# EAGLE board Rov3_zasilanie_v1 (EAGLE 9.4.1)
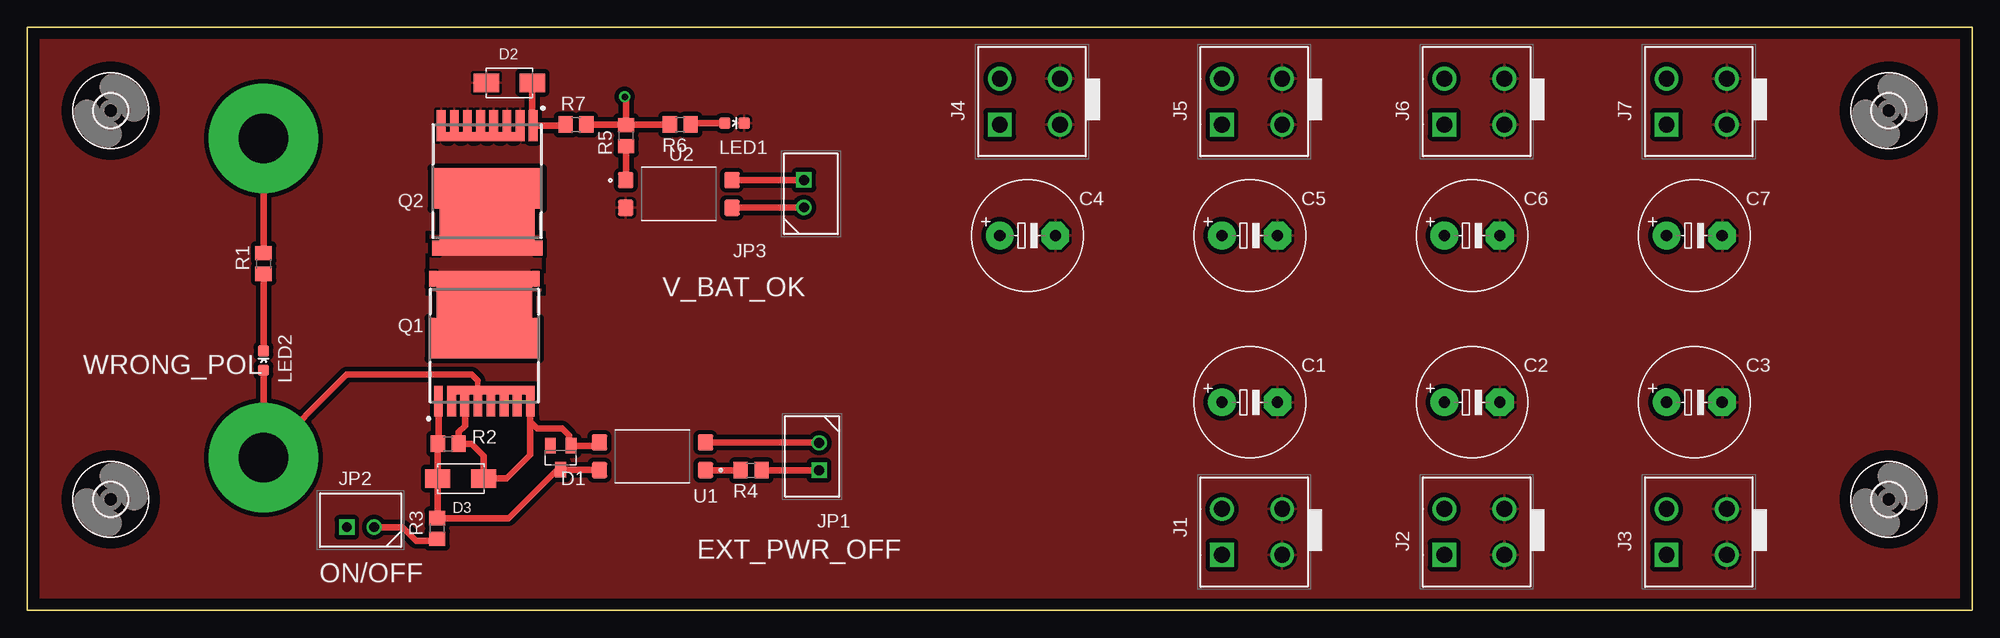
[diagram p0: board, top side]
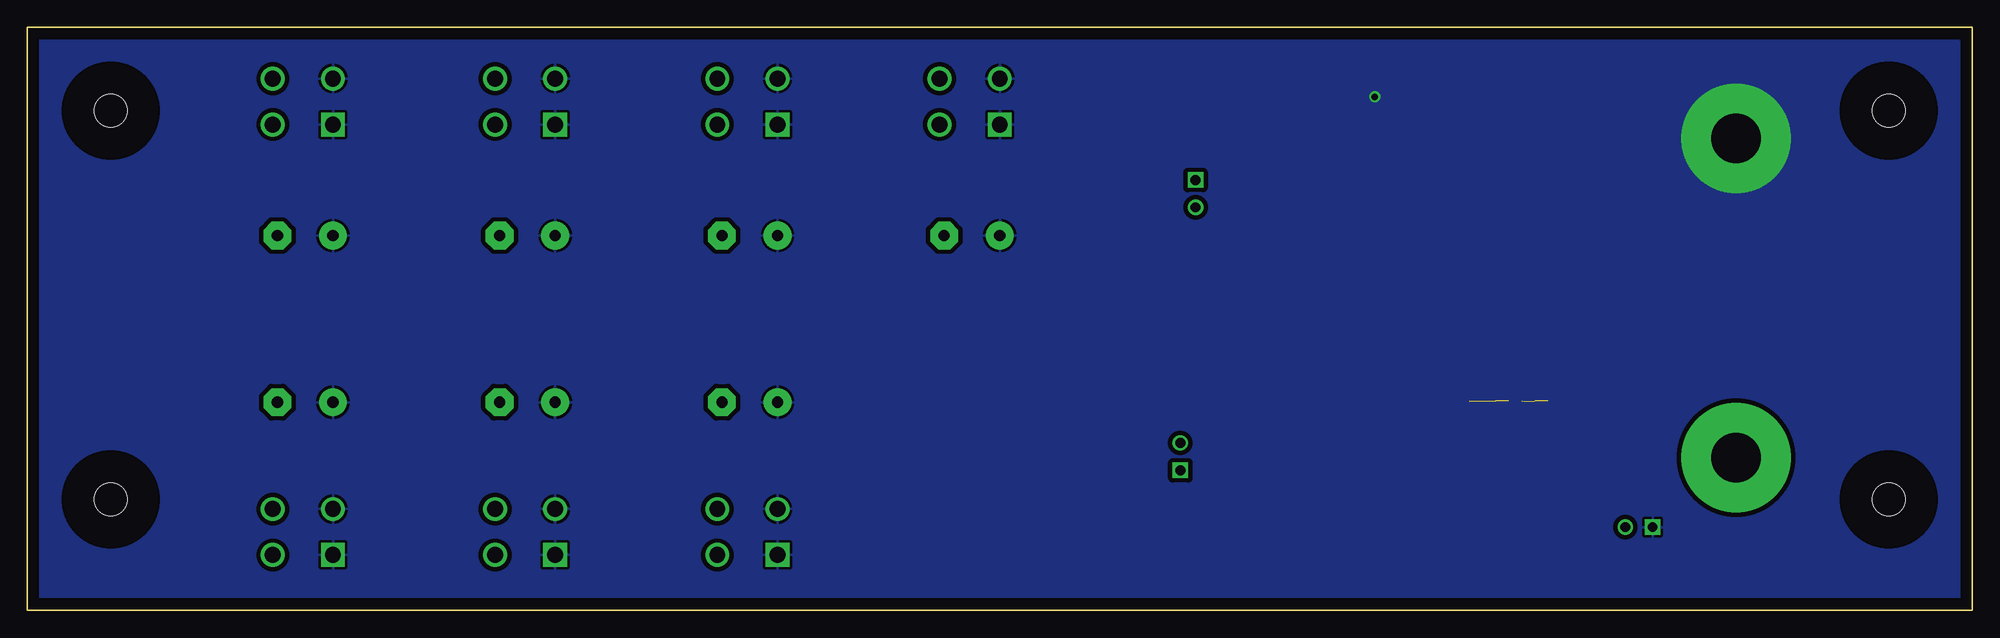
[diagram p1: board, bottom side, seen from below]

Size 177.8 x 53.34 mm. Coordinates in mm from the lower left corner, seen from the top.
Outline: 0,0 177.8,0 177.8,53.34 0,53.34 0,0
Copper layers (1*16): Top 0.035mm / dielectric 1.5mm / Bottom 0.035mm
Design rules "default": minimum track width 6mil, minimum drill 0.35mm, track to track 6mil, track to pad 6mil, pad to pad 6mil, via to via 6mil, smd to smd 6mil, copper to edge 40mil, drill to drill 6mil, minimum pad ring 10mil, minimum via ring 8mil, stop-mask expansion 4mil, vias tented up to drill 0mil, thermal gap 10mil
Net classes: 0 supply: width 0.5 mm, clearance 0.2 mm; 1 signal: width 0.4 mm, drill 0.4 mm, clearance 0.2 mm

## Footprints (pad centres in the part's own frame; a part is rotated, then mirrored left to right if it is on the bottom)
E5-10,5 = drill 1.016 pad 2.54: + -2.54,0 | drill 1.016 pad 2.54 octagon: - 2.54,0
SOT23 = smd 1 x 1.4: 1 -0.95,-1.1; 2 0.95,-1.1; 3 0,1.1
VARTVSP_SMA/DO-214AC = smd 2.3 x 1.7: 1 -2.1,0; 2 2.1,0
MOLEX_2X2_PCB_SOCKET = drill 1.45 pad 2.175 square: 1 -2.54,2.54 | drill 1.45 pad 2.175: 2 -2.54,-2.96; 3 1.66,2.54; 4 1.66,-2.96
2.50MM_MINI-SPOX_2PIN_PCB_SOCKET = drill 0.9 pad 1.35 square: 1 1.27,0 | drill 0.9 pad 1.35: 2 -1.23,0
0603-GREEN = smd 1 x 1: A 0,-0.877; C 0,0.877
0603-RED = smd 1 x 1: A 0,-0.877; C 0,0.877
PG-HSOF-8-1 = smd 0.8 x 2.8: 1 -4.33,-4.982; 2 -3.13,-4.982; 3 -1.93,-4.982; 4 -0.73,-4.982; 5 0.47,-4.982; 6 1.67,-4.982; 7 2.87,-4.982; 8 4.07,-4.982 | smd 8.7 x 8: 9 -0.13,2.918 | smd 0.5 x 0.8: 10 -2.53,-3.982; 11 -1.33,-3.982; 12 -0.13,-3.982; 13 1.07,-3.982; 14 2.27,-3.982; 15 3.47,-3.982 | smd 0.7 x 3.7: 16 -4.83,0.768; 17 4.57,0.768 | smd 0.7 x 1.4: 18 -4.83,6.218; 19 4.57,6.218
R0805 = smd 1.3 x 1.5: 1 -0.95,0; 2 0.95,0
SOIC254P1030X390-4N_EL817S1(A)(TU)-V = smd 1.41 x 1.47: 1 -4.85,1.27; 2 -4.85,-1.27; 3 4.85,-1.27; 4 4.85,1.27
3,0 = hole 3: 0,0

## Placement (x,y rotation side)
C1  [E5-10,5]  111.76,19.05 0 top
C2  [E5-10,5]  132.08,19.05 0 top
C3  [E5-10,5]  152.4,19.05 0 top
C4  [E5-10,5]  91.44,34.29 0 top
C5  [E5-10,5]  111.76,34.29 0 top
C6  [E5-10,5]  132.08,34.29 0 top
C7  [E5-10,5]  152.4,34.29 0 top
D1  BAT54  [SOT23]  48.77,13.97 180 top
D2  [VARTVSP_SMA/DO-214AC]  44.07,48.26 0 top
D3  [VARTVSP_SMA/DO-214AC]  39.62,12.06 180 top
J1  39-28-8040  [MOLEX_2X2_PCB_SOCKET]  111.76,7.62 90 top
J2  39-28-8040  [MOLEX_2X2_PCB_SOCKET]  132.08,7.62 90 top
J3  39-28-8040  [MOLEX_2X2_PCB_SOCKET]  152.4,7.62 90 top
J4  39-28-8040  [MOLEX_2X2_PCB_SOCKET]  91.44,46.99 90 top
J5  39-28-8040  [MOLEX_2X2_PCB_SOCKET]  111.76,46.99 90 top
J6  39-28-8040  [MOLEX_2X2_PCB_SOCKET]  132.08,46.99 90 top
J7  39-28-8040  [MOLEX_2X2_PCB_SOCKET]  152.4,46.99 90 top
JP1  22-03-5025  [2.50MM_MINI-SPOX_2PIN_PCB_SOCKET]  72.39,14.1 270 top
JP2  22-03-5025  [2.50MM_MINI-SPOX_2PIN_PCB_SOCKET]  30.48,7.62 180 top
JP3  22-03-5025  [2.50MM_MINI-SPOX_2PIN_PCB_SOCKET]  70.99,38.1 90 top
LED1  LED-GREEN0603  [0603-GREEN]  64.64,44.58 270 top
LED2  LED-RED0603  [0603-RED]  21.59,22.86 0 top
Q1  IPLU300N04S4-R8  [PG-HSOF-8-1]  41.91,24.13 0 top
Q2  IPLU300N04S4-R8  [PG-HSOF-8-1]  41.91,39.37 180 top
R1  [R0805]  21.59,31.75 90 top
R2  10k  [R0805]  38.48,15.24 180 top
R3  1k  [R0805]  37.47,7.49 90 top
R4  [R0805]  66.17,12.83 180 top
R5  [R0805]  54.74,43.43 90 top
R6  [R0805]  59.69,44.45 180 top
R7  100  [R0805]  50.16,44.45 180 top
U1  EL817S1(A)(TU)-V  [SOIC254P1030X390-4N_EL817S1(A)(TU)-V]  57.15,14.1 180 top
U2  EL817S1(A)(TU)-V  [SOIC254P1030X390-4N_EL817S1(A)(TU)-V]  59.56,38.1 0 top
U$1  [3,0]  7.62,10.16 0 top
U$2  [3,0]  7.62,45.72 0 top
U$3  [3,0]  170.18,45.72 0 top
U$4  [3,0]  170.18,10.16 0 top

## Library data of the parts
C1-C7 = rcl; SPICEPREFIX: C
D1 = diode
D2 D3 = PowerMagnetics (rev18e)
J1-J7 = SamacSys_Parts; DESCRIPTION: Molex Mini-Fit Jr 5566, 4.2mm Pitch, 4 Way, 2 Row Male PCB Header; HEIGHT: 13.1mm; MANUFACTURER_NAME: Molex; MANUFACTURER_PART_NUMBER: 39-28-8040; MOUSER_PART_NUMBER: 538-39-28-8040; MOUSER_PRICE-STOCK: https://www.mouser.com/Search/Refine.aspx?Keyword=538-39-28-8040
JP1-JP3 = SamacSys_Parts; DESCRIPTION: Header 2.5mm SPOX,WTB,vert, shrouded, 2w Molex SPOX Series, Series Number 5267, 2.5mm Pitch 2 Way 1 Row Straight PCB Header, Solder Termination; HEIGHT: 5.9mm; MANUFACTURER_NAME: Molex; MANUFACTURER_PART_NUMBER: 22-03-5025; MOUSER_PART_NUMBER: 538-22-03-5025; MOUSER_PRICE-STOCK: https://www.mouser.com/Search/Refine.aspx?Keyword=538-22-03-5025
LED1 LED2 = BeagleBone_Blue_R3
Q1 Q2 = SamacSys_Parts; DESCRIPTION: MOSFET N-CHANNEL 30/40V; HEIGHT: mm; MANUFACTURER_NAME: Infineon; MANUFACTURER_PART_NUMBER: IPLU300N04S4-R8; MOUSER_PART_NUMBER: 726-IPLU300N04S4-R8; MOUSER_PRICE-STOCK: https://www.mouser.com/Search/Refine.aspx?Keyword=726-IPLU300N04S4-R8
R1-R7 = rcl; SPICEPREFIX: R
U1 U2 = SamacSys_Parts; AVAILABILITY: Unavailable; DESCRIPTION: Optoisoltr 5kv Transistor 4-Smd; MF: Everlight Electronics; MP: EL817S1_A__TU_-V; PACKAGE: SMD-4 Everlight Electronics; PRICE: None
U$1-U$4 = holes

## Nets
GND: C1.- C2.- C3.- C4.- C5.- C6.- C7.- D2.1 J1.2 J1.4 J2.2 J2.4 J3.2 J3.4 J4.2 J4.4 J5.2 J5.4 J6.2 J6.4 J7.2 J7.4 LED1.C Q2.2 Q2.3 Q2.4 Q2.5 Q2.6 Q2.7 Q2.8 U2.2
N$1 [signal]: LED1.A R6.1
N$2: Q1.9 Q2.9
N$3 [signal]: JP1.1 R4.1
N$4 [signal]: D1.3 D3.2 Q1.1 R2.2 R3.2 U1.4
N$5 [signal]: JP1.2 U1.2
N$6 [signal]: R4.2 U1.1
N$7 [signal]: JP2.2 R3.1
N$8 [signal]: JP3.2 U2.3
N$9 [signal]: JP3.1 U2.4
N$10 [signal]: R5.1 U2.1
N$11: LED2.C R1.1
N$15 [signal]: D2.2 Q2.1 R7.2
VBAT+: C1.+ C2.+ C3.+ C4.+ C5.+ C6.+ C7.+ J1.1 J1.3 J2.1 J2.3 J3.1 J3.3 J4.1 J4.3 J5.1 J5.3 J6.1 J6.3 J7.1 J7.3 JP2.1 R1.2 R5.2 R6.2 R7.1
VBAT-: D1.1 D3.1 LED2.A Q1.2 Q1.3 Q1.4 Q1.5 Q1.6 Q1.7 Q1.8 R2.1 U1.3

## Tracks (layer width: path | path; a pad name or v marks a point on that pad's centre or on a via)
GND
  pour Top (isolate 0.406, rank 2): 0,0 177.8,0 177.8,53.34 0,53.34
N$1
  Top 0.4: R6.1 60.77,44.58
  Top 0.61: 60.77,44.58 LED1.A
N$2
  Top 1: 42.04,27.31 Q1.9
  pour Top (no thermals): 36.83,34.29 36.83,29.21 46.99,29.21 46.99,34.29
N$3
  Top 0.61: R4.1 JP1.1
N$4
  Top 0.4: 37.52,8.5 R3.2 | R2.2 37.58,15.29 | 48.43,12.87 D1.3 | 52.26,12.87 U1.4
  Top 0.61: 37.52,8.5 D3.2 R2.2 | Q1.1 37.58,15.29 | R3.2 44,8.44 48.43,12.87 | D1.3 52.26,12.87
N$5
  Top 0.4: 72.35,15.37 JP1.2
  Top 0.61: U1.2 72.35,15.37
N$6
  Top 0.61: U1.1 R4.2
N$7
  Top 0.4: 37.27,6.35 R3.1
  Top 0.61: JP2.2 34.29,7.62 35.56,6.35 37.27,6.35
N$8
  Top 0.4: 70.95,36.83 JP3.2
  Top 0.61: U2.3 70.95,36.83
N$9
  Top 0.61: U2.4 JP3.1
N$10
  Top 0.4: 54.74,39.39 U2.1
  Top 0.61: R5.1 54.74,39.39
N$11
  Top 0.61: LED2.C R1.1
N$15
  Top 0.4: R7.2 49.12,44.35 | 46.17,44.42 Q2.1
  Top 0.61: 49.12,44.35 Q2.1 | D2.2 46.17,44.42
VBAT+  (via drill 0.6, 4.5 pad 10)
  Top 0.508: 54.74,44.45 R5.2 | R5.2 54.61,44.51 | R5.2 54.8,44.45
  Top 0.61: R7.1 54.74,44.45 | 54.8,44.45 R6.2 | R5.2 54.74,46.86 v54.61,46.99 | R1.2 v21.59,43.18
  pour Bottom (isolate 0.406, rank 2): 0,0 177.8,0 177.8,53.34 0,53.34
VBAT-  (via drill 4.5 pad 10)  (5 unrouted)
  Top 0.508: 40.01,19.12 Q1.3 | D1.1 49.53,15.26 | 52,15.07 U1.3 | 41.18,21.05 Q1.4
  Top 0.61: LED2.A v21.59,13.97 29.21,21.59 40.64,21.59 41.18,21.05 | 40.01,19.12 40.01,16.89 39.43,16.32 R2.1 40.64,15.24 41.72,14.16 D3.1 43.81,12.06 45.98,14.23 45.98,17.27 | Q1.8 45.98,17.27 | 49.53,15.26 49.53,16 48.9,16.64 46.62,16.64 45.98,17.27 | D1.1 52,15.07

## Text on the board
tPlace: V_BAT_OK | WRONG_POL | EXT_PWR_OFF | ON/OFF